# Altium PCB LM-003.PcbDoc (part 2 of 2)
Units mm, origin at the board's own origin, x right, y up, seen from the top; angles counter-clockwise.
Board outline 67.01 x 194 mm, 6 copper layers (Top Layer, +5V, Mid-Layer 1, +3.3V, Mid-Layer 2, Bottom Layer), stack 1.23 mm thick; 53 components, 75 nets, 484 pads, 4 vias.
Unrouted connection lines stored in the file: 150.
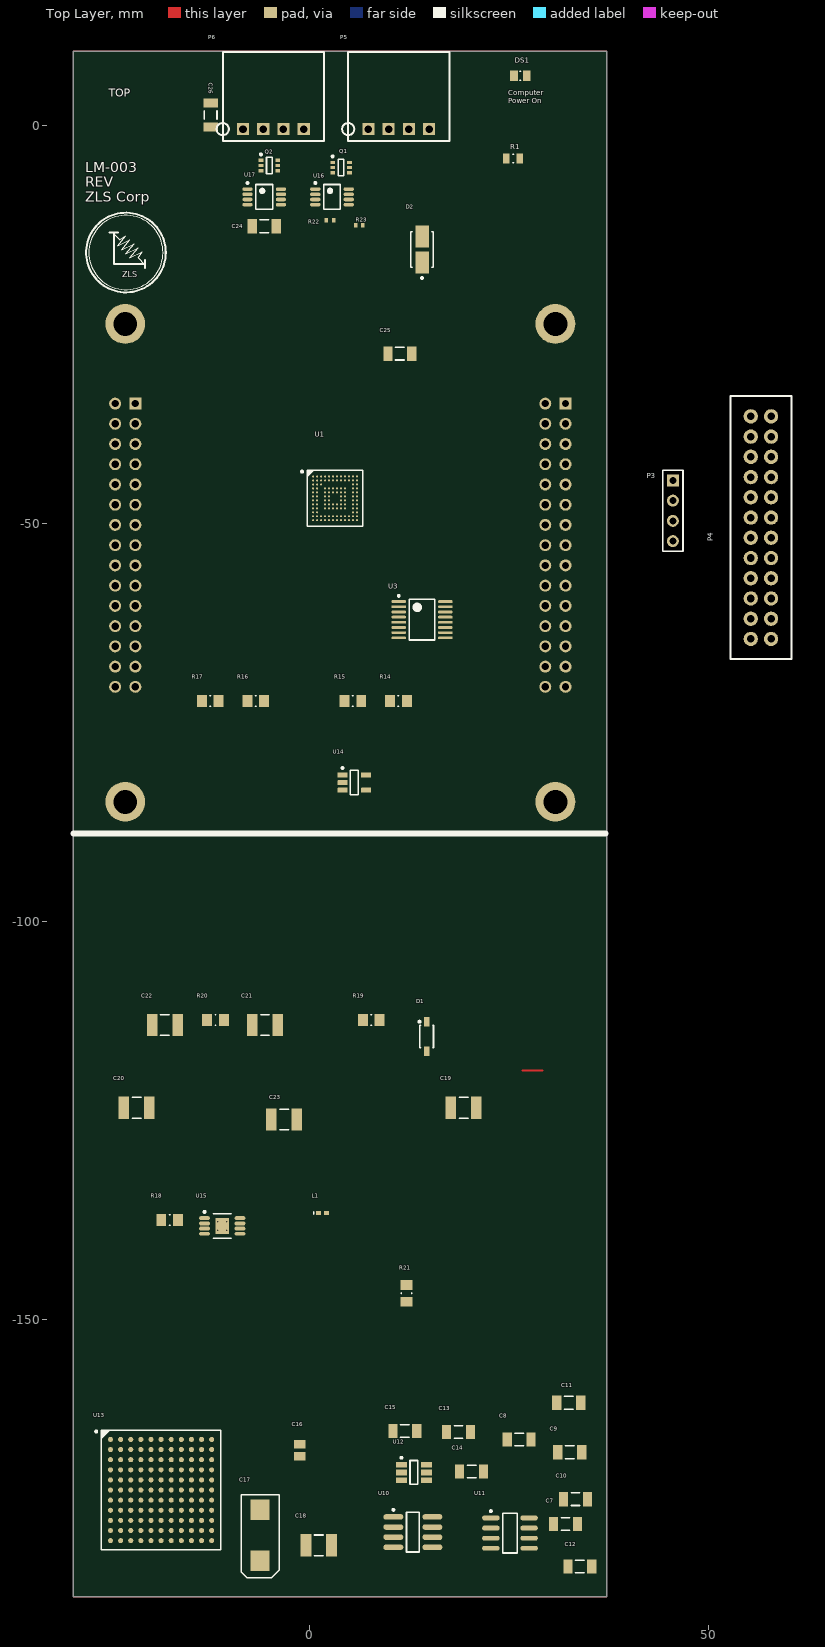
[diagram p0: Top Layer view]

## Part data (continued)
U11: library part CMP-0476-01686-1, "500 mA, Low Noise, LDO Micropower Regulator, 1.8 to 20 V Vin, 3.3 V Vout, 8-pin SOIC (S8-8), -40 to 125 degC, Pb-Free, Tape and Reel", Dropout Voltage(V)=0.3, Manufacturer="Linear Technology", Output Voltage="3.3 V", Shutdown Current(uA)=1, ComponentLink1Description="Manufacturer URL", ComponentLink1URL=http://www.linear.com/, ComponentLink2Description=Datasheet, ComponentLink2URL=http://cds.linear.com/docs/en/datasheet/1763fg.pdf, ComponentLink3Description="Package Specification", ComponentLink3URL=http://cds.linear.com/docs/en/packaging/05081610_G_SO8.pdf, DatasheetVersion="Rev. G", Discrete Pass Element=no, Iout(mA)=500, Isupply(mA)=0.03, Mounting Technology="Surface Mount", Noise(uV)=20, Number of Outputs=1, PackageDescription="8-Pin Plastic Small Outline (Narrow .150 Inch), Body 4.9 x 3.9 mm, Pitch 1.27 mm", PackageReference=S8-8, PackageVersion="Rev. G, 03/2012", Packing="Tape and Reel", PartNumber=LT1763CS8-3.3#TRPBF, PSRR(dB)=65, RoHS=TRUE, Vin Max(V)=20, Vin Min(V)=1.8
U12: Base Part Number=LTC1983-5, Current - Output=100mA, Frequency - Switching=900kHz, Manufacturer="Linear Technology/Analog Devices", Operating Temperature="-40°C ~ 85°C (TA)", Package / Case="SOT-23-6 Thin, TSOT-23-6", Supplier Device Package=TSOT-23-6, Supplier Part Number 1=LTC1983ES6-5#TRMPBFCT-ND, Voltage - Input (Max)=5.5V, Voltage - Input (Min)=2.3V, Voltage - Output (Max)=-, Voltage - Output (Min/Fixed)=-5V, Category="Integrated Circuits (ICs)", ComponentLink1Description=http://www.linear.com/docs/2135, ComponentLink1URL=http://www.linear.com/docs/2135, Function=Step-Down, Manufacturer Part Number=LTC1983ES6-5#TRMPBF, Mounting Type="Surface Mount", Number of Outputs=1, Output Configuration=Negative, Output Type=Fixed, Packaging="Cut Tape (CT)", Part Status=Active, Pricing 1="1=4.36, 25=3.8952, 100=2.3256, 250=2.1318 (USD)", RoHS="RoHS Compliant", Stock 1=17516, Supplier 1=Digi-Key, Synchronous Rectifier=No, Topology="Charge Pump"
U13: library part CMP-2000-06614-1, "Buck-Boost uModule Regulator, 8.5 A, 5 to 36 V, -40 to 125 degC, 121-Ball BGA, RoHS, Tray", Current - Output (Max)=8.5A, Manufacturer=LinearTechnology, Operating Temperature=-40°C~125°C, Package / Case=121-BGA, Package Description="121-Ball BGA, Body 15 x 15 mm, Pitch 1.27 mm", Package Reference=BGA-121, Package Version="Rev. A, 11/2012", Power (Watts) - Manufacture Series=-, Voltage - Input (Max)=36V, Voltage - Input (Min)=5V, Voltage - Output 1=1.2~36V, Applications=ITE(Commercial), Category=PowerSupplies-BoardMount, Datasheet URL=http://cds.linear.com/docs/en/datasheet/8055fa.pdf, Datasheet Version="Rev. A, 01/2016", Efficiency=97.5%, Family=DCDCConverters, Features=OTP, Manufacturer URL=http://www.linear.com/, Mounting Technology=SurfaceMount, Mounting Type=SurfaceMount, Number of Outputs=1, Package URL=http://www.linear.com/docs/41075, Packaging=Tray, PartId=1, Power (Watts) - Max=-, Series=µModule®, Type=Non-IsolatedPoLModule, Voltage - Isolation=-, Voltage - Output 2=-, Voltage - Output 3=-
U14: library part CMP-0809-00005-2, "Precision, Low Noise, Rail-to-Rail Output, Zero-Drift Operational Amplifier, 4 to 36 V, -40 to 125 degC, 5-pin SOT23 (DBV5), Green (RoHS & no Sb/Br)", Current - Supply=450µA, Manufacturer="Texas Instruments", Operating Temperature="-40°C ~ 125°C", Package / Case="SC-74A, SOT-753", Supplier Device Package=SOT-23-5, Supplier Part Number 1=296-40438-1-ND, Voltage - Supply, Single/Dual (±)="4 V ~ 36 V, ±2 V ~ 18 V", Amplifier Type=Zero-Drift, Category="Integrated Circuits (ICs)", ComponentLink1Description=http://www.ti.com/lit/ds/symlink/opa188.pdf, ComponentLink1URL=http://www.ti.com/lit/ds/symlink/opa188.pdf, Manufacturer Part Number=OPA188AIDBVR, Mounting Type="Surface Mount", Output Type=Rail-to-Rail, Packaging="Cut Tape (CT)", Part Status=Active, Pricing 1="1=2.46, 10=2.211, 100=1.7771, 500=1.46002, 1000=1.20974 (USD)", RoHS="RoHS Compliant", Slew Rate="0.8 V/µs", Stock 1=1779, Supplier 1=Digi-Key
U15: Supplier Part Number 1=LT8570IMS8E-1#PBF-ND, Supplier 1=Digi-Key
U16 U17: library part CMP-0479-00214-1, "Low Loss PowerPath Controller for Large PFET, 3 to 36 V Vin, 8-pin SOP (MS8-8), -40 to 85 degC, Pb-Free, Tape and Reel", Manufacturer="Linear Technology", ComponentLink1Description="Manufacturer URL", ComponentLink1URL=http://www.linear.com/, ComponentLink2Description=Datasheet, ComponentLink2URL=http://cds.linear.com/docs/en/datasheet/4414fc.pdf, ComponentLink3Description="Package Specification", ComponentLink3URL=http://cds.linear.com/docs/en/packaging/05081660_G_MS8.pdf, DatasheetVersion="Rev. C", Ideal Diode="Single, External, P-Channel", Mounting Technology="Surface Mount", PackageDescription="8-Pin Plastic MSOP, Body 3 x 3 mm, Pitch 0.65 mm", PackageReference=MS8-8, PackageVersion="Rev. G, 03/2012", Packing="Tape and Reel", PartNumber=LTC4414EMS8#TRPBF, RoHS=TRUE
L1: Code_IEC=1005, Code_JEITA=0402, LatestRevisionDate=29-May-2009, LatestRevisionNote="IPC-7351 Footprint Added.", PackageDescription="Chip Inductor", PackageReference=0402-A, Published=8-Jun-2000, Publisher="Altium Limited"

## Free pads (board coordinates)
  round 5 hole 3 unplated: ""(-23.16,-84.966) ""(-23.16,-24.966) ""(30.84,-84.966) ""(30.84,-24.966)

## Via types
v1: diameter 0.5, hole 0.2, Top Layer to Bottom Layer, 4 vias

## Nets (pads, with @x,y where several pads share a name; then routed paths per layer and width w, separated by ;. In a path a pad name is that pad's centre, name@x,y a point inside that pad or via, vN(x,y) a via of type N, cw(c..) or ccw(c..) an arc to the next point about the centre after c; other vN are vias at no path point)
5V-RC: U10.5 U11.5
+3.3: C8.2 C12.1 P1.5 P2.26 P3.3 P3.4 P4.20 R22.2 R23.2 U3.2 U3.13 U11.1 U11.2
+5: C7.2 C11.1 C13.2 DS1.1 P1.1 P2.21 P4.19 U10.1 U10.2 U12.1 U12.6 U14.5
"+5 BBB": P2.2
+12: C9.2 C10.2 C16.1 C17.1 P1.13 P2.29 P2.30 P3.1 P3.2 P4.21 P4.22 R14.1 U10.8 U11.8 U13.A1 U13.A2 U13.A3 U13.A4 U13.A5 U13.A6 U13.B1 U13.B2 U13.B3 U13.B4 U13.B5 U13.B6 U13.C1 U13.C2 U13.C3 U13.C4 U13.C5 U13.C6 U13.D1
-5: C14.2 P1.17 P2.25 P4.3 U12.2
"Arrestment Heater FET_Buff": P4.16
Aux+: D2.1 P5.1
Batt_1_Stat: P1.8 R22.1 U16.1
Batt_2_Stat: P1.10 R23.1 U17.1
Battery_1: C25.2 P1.11 P6.1 Q1.1 Q1.2 Q1.5 Q1.6 U16.7
Battery_2: C26.2 P1.15 P6.3 Q2.1 Q2.2 Q2.5 Q2.6 U17.7
BBB_PWR_SW: P2.4 P5.2
"Board Heater FET_Buff 1": P4.17
"Board Heater FET_Buff 2": P4.18
"Conning Tower Heater FET Buff": P4.14
DAC_CS0: P2.9
Encoder_CS0: U3.12
FB_CS0: P2.5 U3.5
FB_MUX_A0: P1.28
FB_MUX_A1: P1.26
"Gearbox Heater FET_Buff": P4.15
GND: C7.1 C8.1 C9.1 C10.1 C13.1 C14.1 C16.2 C17.2 C18.1 C19.1 C21.1 C22.1 C23.1 C24.1 C25.1 C26.1 P1.3 P1.24 P1.27 P2.1 P2.19 P2.20 P2.22 P2.23 P2.24 P2.27 P2.28 P4.1 P4.2 P4.23 P4.24 P5.3 P5.4 P6.2 P6.4 R1.2 R15.2 R16.2 R17.2 R21.2 U1.A5 U1.A8 U1.B11 U1.B12 U1.F2 U1.G2 U1.G12 U1.M1 U3.3 U3.14 U10.3 U10.6 U10.7 U11.3 U11.6 U11.7 U12.5 U13.A7 U13.A8 U13.A9 U13.A10 U13.A11 U13.B7 U13.B8 U13.B9 U13.B10 U13.B11 U13.C7 U13.C8 U13.C9 U13.C10 U13.C11 U13.D2 U13.D3 U13.D4 U13.D5 U13.D6 U13.D7 U13.D8 U13.D9 U13.D10 U13.D11 U13.E1 U13.E2 U13.E3 U13.E4 U13.E5 U13.E6 U13.E7 U13.E8 U13.E9 U13.E10 U13.E11 U13.F2 U13.F3 U13.F4 U13.F5 U13.F6 U13.F7 U13.F8 U13.F9 U13.G3 U13.G4 U13.G5 U13.G6 U13.G7 U13.G8 U13.G9 U13.H2 U13.H3 U13.H4 U13.H5 U13.H6 U13.H7 U13.H8 U13.H9 U13.J3 U13.J4 U13.J5 U13.J6 U13.J7 U13.J8 U13.J9 U13.K3 U13.K4 U13.K5 U13.K6 U13.K7 U13.K8 U13.K9 U13.L1 U13.L5 U13.L6 U13.L7 U13.L8 U14.2 U15.8 U15.9 U16.2 U16.3 U17.2 U17.3
  other v1: -11.538,-138.767 -10.438,-138.767 -11.538,-137.667 -10.438,-137.667
Heater_CS0: U3.7
"Meter Heater FET_Buff": P4.13
"MUX A2": P4.7
"MUX A3": P4.11
MUX_A0: P4.8
MUX_A1: P4.6
NetC11_2: C11.2 U10.4
NetC12_2: C12.2 U11.4
NetC15_1: C15.1 U12.4
NetC15_2: C15.2 U12.3
NetC20_1: C20.1 C21.2 R18.2 U15.1
NetC22_2: C22.2 R20.2
NetC23_2: C23.2 U15.7
NetD1_1: D1.1 L1.2 U15.4
NetDS1_2: DS1.2 R1.1
NetP1_21: P1.21
NetQ1_3: Q1.3 U16.8
NetQ2_3: Q2.3 U17.8
NetR14_2: R14.2 R16.1 U13.J1
NetR17_1: R17.1 U13.H1
NetR19_2: R19.2 U15.5
NetR20_1: R20.1 U15.2
NetR21_1: R21.1 U15.6
NetU1_H7: U1.H7
NetU1_J6: U1.J6
NetU1_L6: U1.L6
NetU1_L7: U1.L7
NetU1_L8: U1.L8
NetU1_M5: U1.M5
NetU1_M6: U1.M6
NetU1_M8: U1.M8
Power_CS0: U3.11
Power_IN: C18.2 C19.2 C24.2 D2.2 L1.1 Q1.4 Q2.4 R19.1 U13.F10 U13.F11 U13.G10 U13.G11 U13.H10 U13.H11 U13.J10 U13.J11 U13.K10 U13.K11 U13.L9 U13.L10 U13.L11 U15.3 U16.6 U17.6
PWM1A: P2.8
PWM2A: P1.18
PWM2B: P1.22 U1.H6
RC: R15.1 U13.L4 U14.1 U14.4
SPI0_CS0: U3.8
"SPI0_CS0_MUX A2": U1.M10 U3.15
SPI0_CS0_MUX_A0: U1.M9 U3.1
SPI0_CS0_MUX_A1: U1.L9 U3.16
SPI0_MISO: P2.12 P4.9
SPI0_MOSI: P2.10
SPI0_SCLK: P2.14 P4.10
SPI0_SYS_VOLTAGE_CS0: U3.4
SPI1_CS0: U1.J12
SPI1_MISO: U1.G9
SPI1_MOSI: U1.E12
SPI1_SCLK: U1.F11
Sys_Pwr_Enable: P1.14 U14.3
Thermistor_CS0: P4.12
ZH: C20.2 D1.2 P2.17 R18.1
pads on no net: P1.2 P1.4 P1.6 P1.7 P1.9 P1.12 P1.16 P1.19 P1.20 P1.23 P1.25 P1.29 P1.30 P2.3 P2.6 P2.7 P2.11 P2.13 P2.15 P2.16 P2.18 P4.4 P4.5 U1.A1 U1.A2 U1.A3 U1.A4 U1.A6 U1.A7 U1.A9 U1.A10 U1.A11 U1.A12 U1.B1 U1.B2 U1.B3 U1.B4 U1.B5 U1.B6 U1.B7 U1.B8 U1.B9 U1.B10 U1.C1 U1.C2 U1.C3 U1.C11 U1.C12 U1.D1 U1.D2 U1.D4 U1.D5 U1.D6 U1.D7 U1.D8 U1.D9 U1.D11 U1.D12 U1.E1 U1.E2 U1.E4 U1.E5 U1.E6 U1.E7 U1.E8 U1.E9 U1.E11 U1.F1 U1.F4 U1.F5 U1.F8 U1.F9 U1.F12 U1.G1 U1.G4 U1.G5 U1.G8 U1.G11 U1.H1 U1.H2 U1.H4 U1.H5 U1.H8 U1.H9 U1.H11 U1.H12 U1.J1 U1.J2 U1.J4 U1.J5 U1.J7 U1.J8 U1.J9 U1.J11 U1.K1 U1.K2 U1.K11 U1.K12 U1.L1 U1.L2 U1.L3 U1.L4 U1.L5 U1.L10 U1.L11 U1.L12 U1.M2 U1.M3 U1.M4 U1.M7 U1.M11 U1.M12 U3.6 U3.9 U3.10 U13.F1 U13.G1 U13.G2 U13.J2 U13.K1 U13.K2 U13.L2 U13.L3 U16.4 U16.5 U17.4 U17.5
copper on no net: | length 2.5
  Top Layer w0.254: 26.705,-118.71 29.245,-118.71

## Polygon pours and split planes (outlines as drawn)
GND on Top Layer "GND" (solid, shelved, pour order 95): -29.695,-184.767 37.31,-184.767 37.31,9.268 -29.695,9.268
GND on Bottom Layer "GND" (solid, shelved, pour order 79): -29.695,-184.767 37.31,-184.767 37.31,9.234 -29.695,9.234
+5 on +5V (split plane): 36.8,-184.256 -29.185,-184.256 -29.185,8.724 36.8,8.724
+3.3 on +3.3V (split plane): 36.8,-184.256 -29.185,-184.256 -29.185,8.724 36.8,8.724

## Silkscreen, mask and mechanical layers (free items; w line width, h text height)
Top Overlay:
  circle w0.1: c-23.079,-16.005 r4.663
  circle w0.254: c-23.079,-16.005 r5
  lines w0.025: -29.545,-88.766 -25.69,-88.766
  lines w0.1: -24.603,-13.643 -23.841,-14.405 -23.079,-13.897 -24.095,-15.167 -22.571,-14.405 -23.587,-15.675 -22.063,-14.913 -23.079,-16.183 -21.555,-15.421 -22.571,-16.691 -21.047,-15.929 -21.555,-16.691 -20.793,-17.453
  lines w0.254: -25.111,-13.516 -24.095,-13.516 ; -24.603,-13.643 -24.603,-17.453 -20.793,-17.453 ; -20.666,-17.961 -20.666,-16.945
  lines w0.762: -29.673,-88.966 37.104,-88.966
  text "TOP" at -25.263,3.534 h1
  text "Computer  / Power On" at 24.927,2.754 h0.65
  text "LM-003" at -28.159,-5.934 h1.27
  text "REV" at -28.159,-7.75 h1.27
  text "ZLS Corp" at -28.159,-9.655 h1.27
  text "ZLS" at -23.516,-19.09 h0.75
Bottom Overlay:
  lines w0.254: -29.56,-88.776 -25.705,-88.776 ; 33.275,-88.766 37.13,-88.766
  lines w0.762: -29.683,-88.966 36.357,-88.966
  text "40" at 147.389,-8.748 h0.65
  text "P9" at 30.353,-114.457 h0.65
  text "2" at 24.8,-116.424 h0.65
  text "1" at 32.494,-116.466 h0.65
Mechanical 13:
  text "Stand-off for bottom: / HEX STANDOFF #4-40 SS 7/16\" / P/N: 4504-440-SS" at -30.78,26.54 h0.65
  text "Stand-off for top:  / HEX STANDOFF #4-40 SS 3/8\" / P/N: 2055-440-SS-20" at 24.846,26.032 h0.65
  text "Heater Control / ADC / Levels  / Feedback / Motor Control / Bluetooth" at -128.905,-33.528 h3
  text "BBB Position  X: 1320 mil   Y:1600 mil" at -10.887,-186.82 h0.65
  text "Stand-off for top: / HEX STANDOFF #4-40 SS 7/16\" / P/N: 2056-440-SS" at -43.653,-192.878 h0.65
  text "Stand-off for bottom: / HEX STANDOFF #4-40 SS 7/16\" / P/N: 4504-440-SS" at -43.907,-198.974 h0.65

## Dimensions
-29.695,-184.767 to 37.31,-184.767 on Mechanical 13
-29.695,9.234 to -23.16,-84.966 on Mechanical 13
-23.16,-84.966 to -29.673,-88.966 on Mechanical 13
30.84,-24.966 to -23.16,-24.966 on Mechanical 13
-23.16,-24.966 to -23.16,-84.966 on Mechanical 13
-29.695,-184.767 to -31.69,9.234 on Mechanical 13
37.31,9.238 to -29.695,9.234 on Mechanical 13